# EAGLE board SuperCap_Proto (EAGLE 6.4)
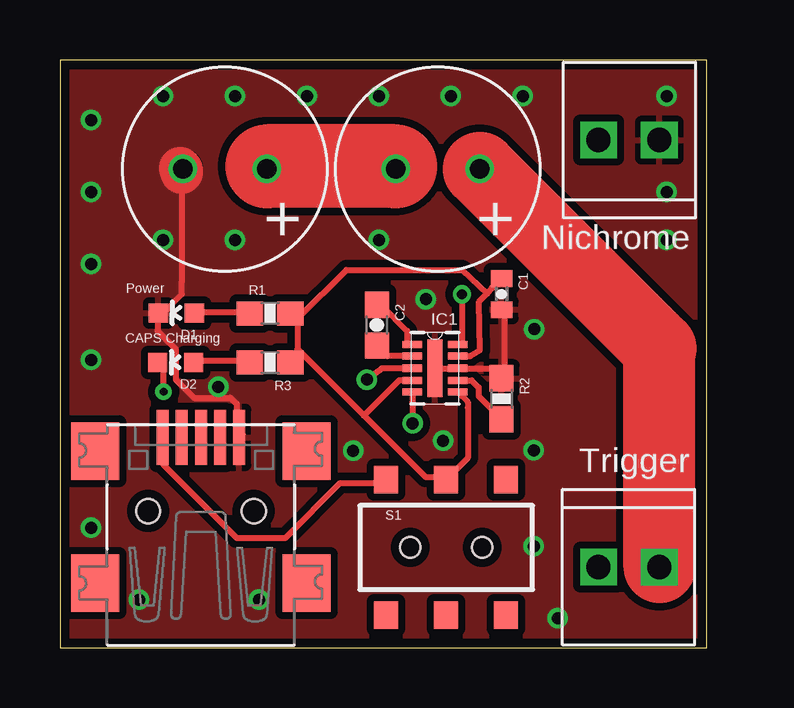
[diagram p0: board, top side]
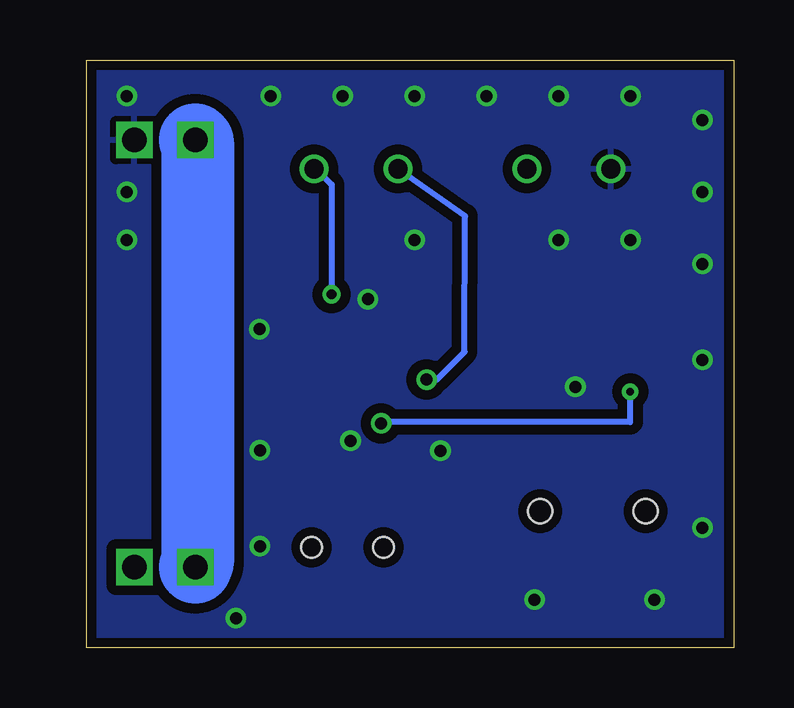
[diagram p1: board, bottom side, seen from below]

Size 26.98 x 24.5 mm. Coordinates in mm from the lower left corner, seen from the top.
Outline: 0,0 26.98,0 26.98,24.5 0,24.5 0,0
Copper layers (1*16): Top 0.0356mm / dielectric 1.5011mm / Bottom 0.0356mm
Design rules "LaenPCBOrder": minimum track width 6mil, minimum drill 13mil, track to track 6mil, track to pad 6mil, pad to pad 6mil, via to via 6mil, smd to smd 6mil, copper to edge 15mil, drill to drill 6mil, minimum pad ring 7mil, minimum via ring 7mil, stop-mask expansion 3mil, vias tented up to drill 0mil, thermal gap 10mil
Net classes: 0 default: width 0.254 mm, drill 0.305 mm, clearance 0.203 mm; 1 power: width 0.254 mm, drill 0.406 mm, clearance 0.203 mm; 2 CAP: width 3.048 mm, drill 0.406 mm, clearance 0.203 mm; 3 power usb: width 0.254 mm, drill 0.406 mm, clearance 0.203 mm

## Footprints (pad centres in the part's own frame; a part is rotated, then mirrored left to right if it is on the bottom)
0402-CAP = smd 0.7 x 0.9: 1 -0.65,0; 2 0.65,0
0603-CAP = smd 1.1 x 1: 1 -0.85,0; 2 0.85,0
CAP_POL_RADIAL_6F_2.7V = drill 0.8: P$1 -1.75,0; P$2 1.75,0
USB-MINIB = smd 0.5 x 2.308: D+ 0,4.064; D- -0.8,4.064; GND 1.6,4.064; ID 0.8,4.064; VBUS -1.6,4.064 | smd 2 x 2.4: GND1 -4.4,-2; GND2 -4.4,3.5; GND3 4.4,3.5; GND4 4.4,-2 | hole 1: -2.2,1; 2.2,1
1X02_2.54_SCREWTERM = drill 1.016 square: P1 2.54,0; P2 0,0
LED-0603 = smd 0.8 x 0.8: A 0,-0.75; C 0,0.75
DFN300X200X80 = smd 0.813 x 0.305: 1 -0.94,0.991; 2 -0.94,0.508; 3 -0.94,0; 4 -0.94,-0.508; 5 -0.94,-0.991; 6 0.94,-0.991; 7 0.94,-0.508; 8 0.94,0; 9 0.94,0.508; 10 0.94,0.991 | smd 0.635 x 2.388: 11 0,0
0603-RES = smd 1.1 x 1: 1 -0.85,0; 2 0.85,0
AYZ0202 = smd 1 x 1.15: 1 -2.5,2.825; 2 0,2.825; 3 2.5,2.825; 4 -2.5,-2.825; 5 0,-2.825; 6 2.5,-2.825 | hole 0.85: 1.5,0; -1.5,0

## Placement (x,y rotation side)
C1  C1005X5R0J225K050BC  [0402-CAP]  18.41,14.73 270 top
C2  0603ZD105KAT2A  [0603-CAP]  13.21,13.45 270 top
C3  HV0830-2R7605-R  [CAP_POL_RADIAL_6F_2.7V]  15.75,19.95 180 top
C4  HV0830-2R7605-R  [CAP_POL_RADIAL_6F_2.7V]  6.88,19.95 180 top
CN1  [USB-MINIB]  5.88,4.7 0 top
CUT_SW  M022.54MM_SCREWTERM  [1X02_2.54_SCREWTERM]  22.45,3.35 0 top
CUTDOWN  M022.54MM_SCREWTERM  [1X02_2.54_SCREWTERM]  24.99,21.16 180 top
D1  LTW-C193TS5  [LED-0603]  4.85,13.95 90 top
D2  APT1608SRCPRV  [LED-0603]  4.83,11.89 90 top
IC1  LTC3225EDDB-1TRPBF  [DFN300X200X80]  15.63,11.64 0 top
R1  390  [0603-RES]  8.76,13.94 0 top
R2  12k  [0603-RES]  18.41,10.38 270 top
R3  180  [0603-RES]  8.76,11.89 180 top
S1  AYZ0202AGRL  [AYZ0202]  16.1,4.17 0 top

## Library data of the parts
C1 = SparkFun-Capacitors; PROD_ID: CAP-07888
C2 = SparkFun-Capacitors; PROD_ID: CAP-00868
C3 C4 IC1 = wrea
CN1 = adafruit
CUT_SW CUTDOWN = SparkFun-Connectors
D1 = SparkFun-LED
D2 = SparkFun-LED; PROD_ID: DIO-00819
R1-R3 = SparkFun-Resistors
S1 = SparkFun-Electromechanical; PROD_ID: SWCH-08179

## Nets
5V [power]: C1.1 IC1.4 IC1.6 IC1.9 R1.2 R3.1 S1.2
GND [power]: C1.2 C4.P$2 CN1.GND CUTDOWN.P2 D1.C IC1.8 IC1.11 R2.1
N$1 [CAP]: CUT_SW.P2 CUTDOWN.P1
N$2 [power]: C3.P$1 CUT_SW.P1 IC1.10
N$3 [power]: CN1.VBUS S1.1
N$4: D2.C IC1.5
N$11: IC1.7 R2.2
N$15: D2.A R3.2
N$17: D1.A R1.1
N$18: C3.P$2 C4.P$1 IC1.3
N$21: C2.1 IC1.1
N$23: C2.2 IC1.2

## Tracks (layer width: path | path; a pad name or v marks a point on that pad's centre or on a via)
5V
  Top 0.254: 9.91,13.72 9.91,12.45 | 9.91,12.45 9.91,11.94 R3.1 | 9.91,13.72 R1.2 9.91,13.72 | IC1.9 17.1,12.15 17.5,12.4 17.48,14.43 17.81,14.76 | 17.81,14.76 18,15 18.03,15 C1.1 | 17.81,14.76 16.76,15.75 11.94,15.75 9.91,13.72 | 17.81,14.76 17.78,14.73 17.81,14.76 | 9.91,12.45 12.68,9.68 | 12.68,9.68 15.24,7.11 16,7.11 S1.2 17,7.9 17,10 17,10.23 IC1.6 | IC1.4 14.14,11.14 12.68,9.68
GND  (via drill 0.5)
  Top 0.254: 7.62,8.89 CN1.GND 7.37,8.89 7.37,10.16 7.11,10.41 5.59,10.41 4.83,11.18 4.83,12.45 4.06,13.21 4.06,13.72 D1.C | 4.32,13.97 5.08,14.73 5.08,15.24 5.08,19.81 | 4.32,13.97 D1.C | 5.08,20.07 5.08,19.92 | IC1.11 IC1.8 17.99,11.64 R2.1 18.54,11.43 18.54,13.97 C1.2 | 4.32,13.97 D1.C
  Top 1.778: 5.08,19.81 5.08,19.92 5,20
  other vias: 6.6,10.88 16.3,23 1.3,22 1.3,19 1.3,16 1.3,12 19.3,23 15.25,14.53 15.97,8.62 19.77,13.28 19.75,8.22 19.75,4.22 20.75,1.23 3.3,2 8.3,2 1.3,5 13.3,23 10.3,23 7.3,23 4.3,23 25.3,19 25.3,17 7.3,17 4.3,17 13.3,17 12.22,8.2 25.3,23
  pour Top (isolate 0.305): 0,0 27,0 26.95,0.05 26.95,24.52 0.05,24.52 0,24.48
  pour Bottom (isolate 0.406): 0,0 27,0 27,24.45 0.15,24.45 0.05,24.35 0,24.3
N$1
  Bottom 3.048: CUT_SW.P2 22.35,3.56 22.35,21.08 CUTDOWN.P1
N$2  (via drill 0.41)
  Top 0.254: IC1.10 16.76,12.7 16.76,13.46 v16.76,14.73
  Top 3: CUT_SW.P1 24.99,12.46
  Top 3.1: 24.99,12.46 C3.P$1
  Bottom 0.254: v16.76,14.73 16.76,19.3 17.27,19.81 C3.P$1
N$3
  Top 0.254: S1.1 13.97,6.86 11.68,6.86 9.4,4.57 7.37,4.57 4.32,7.62 4.32,8.64 CN1.VBUS
N$4  (via drill 0.33, 0.5)
  Top 0.254: IC1.5 14.7,10.23 v14.7,9.35 | 4.06,11.68 D2.C 4.32,11.68 v4.32,10.67
  Bottom 0.254: v14.7,9.35 14.48,9.4 4.32,9.4 v4.32,10.67
N$11
  Top 0.254: IC1.7 17.16,11.14 17.45,10.85 17.45,10.48 R2.2
N$15
  Top 0.254: D2.A 5.59,11.94 8.13,11.94 R3.2
N$17
  Top 0.254: D1.A 5.84,13.97 8.13,13.97 R1.1
N$18  (via drill 0.5)
  Top 0.254: 8.64,20.07 C4.P$1 | 13.97,20.07 C3.P$2 | IC1.3 13.42,11.64 v12.8,11.18
  Top 3.5: 13.97,20.07 8.64,20.07
  Bottom 0.254: v12.8,11.18 12.38,11.18 11.22,12.32 11.2,17.98 C3.P$2
N$21
  Top 0.254: IC1.1 14.48,12.7 14.48,13.21 13.46,14.22 C2.1
N$23
  Top 0.254: IC1.2 13.65,12.15 C2.2

## Text on the board
tNames: Nichrome | Power | CAPS Charging | Trigger